# Altium PCB Rev2_7500-8500.PcbDoc
Units mil, origin at the board's own origin, x right, y up, seen from the top; angles counter-clockwise.
Board outline 1250 x 840 mil, 2 copper layers (Top Layer, Bottom Layer); 12 components, 9 nets, 58 pads, 22 vias.
Unrouted connection lines stored in the file: 2.
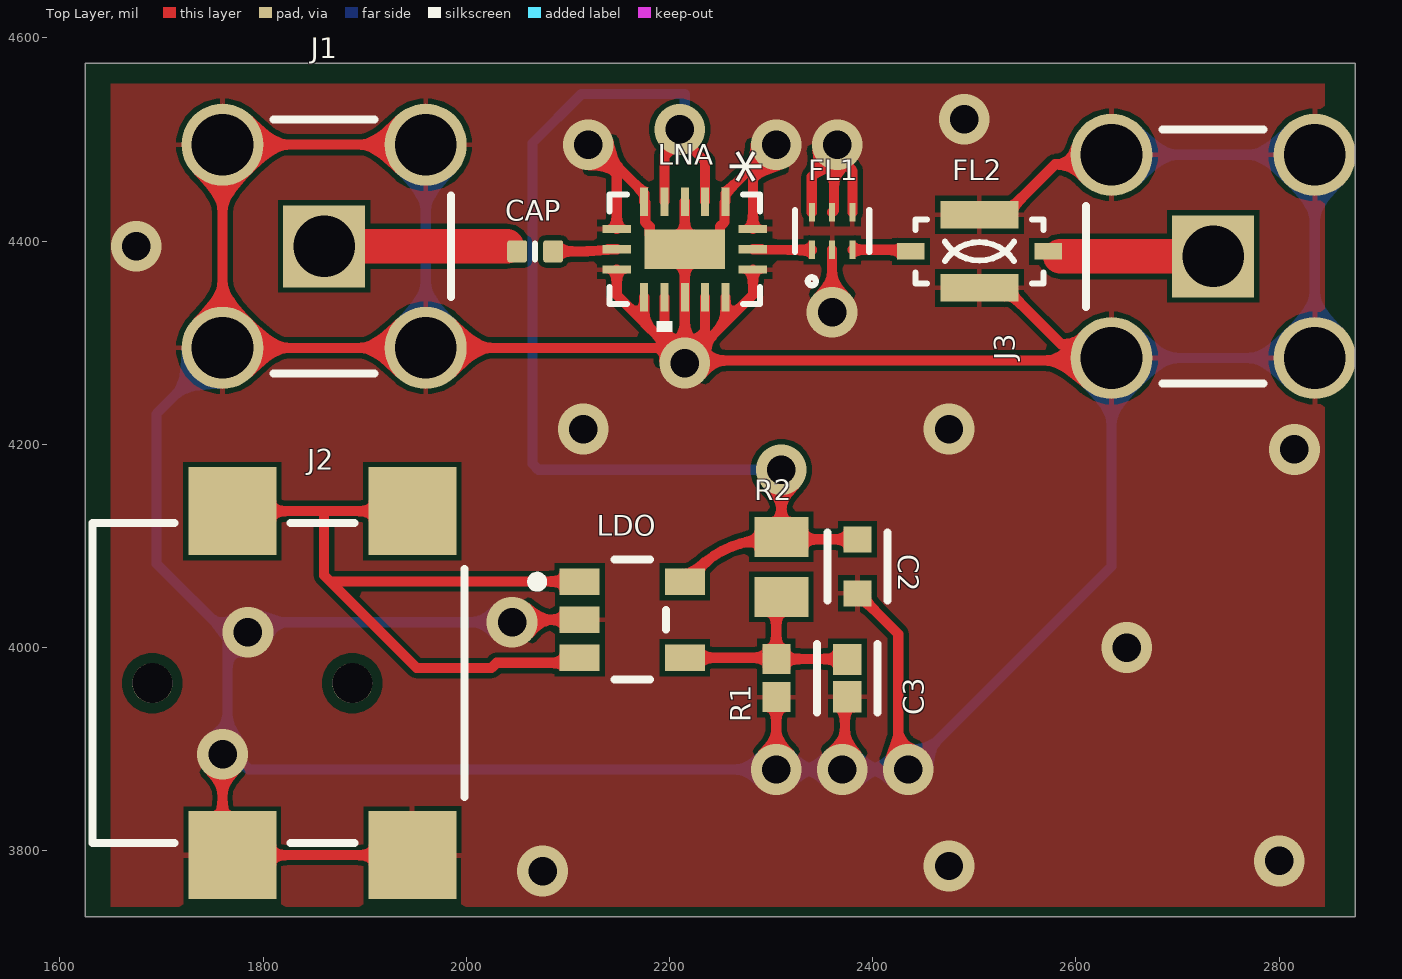
[diagram p0: Top Layer view]
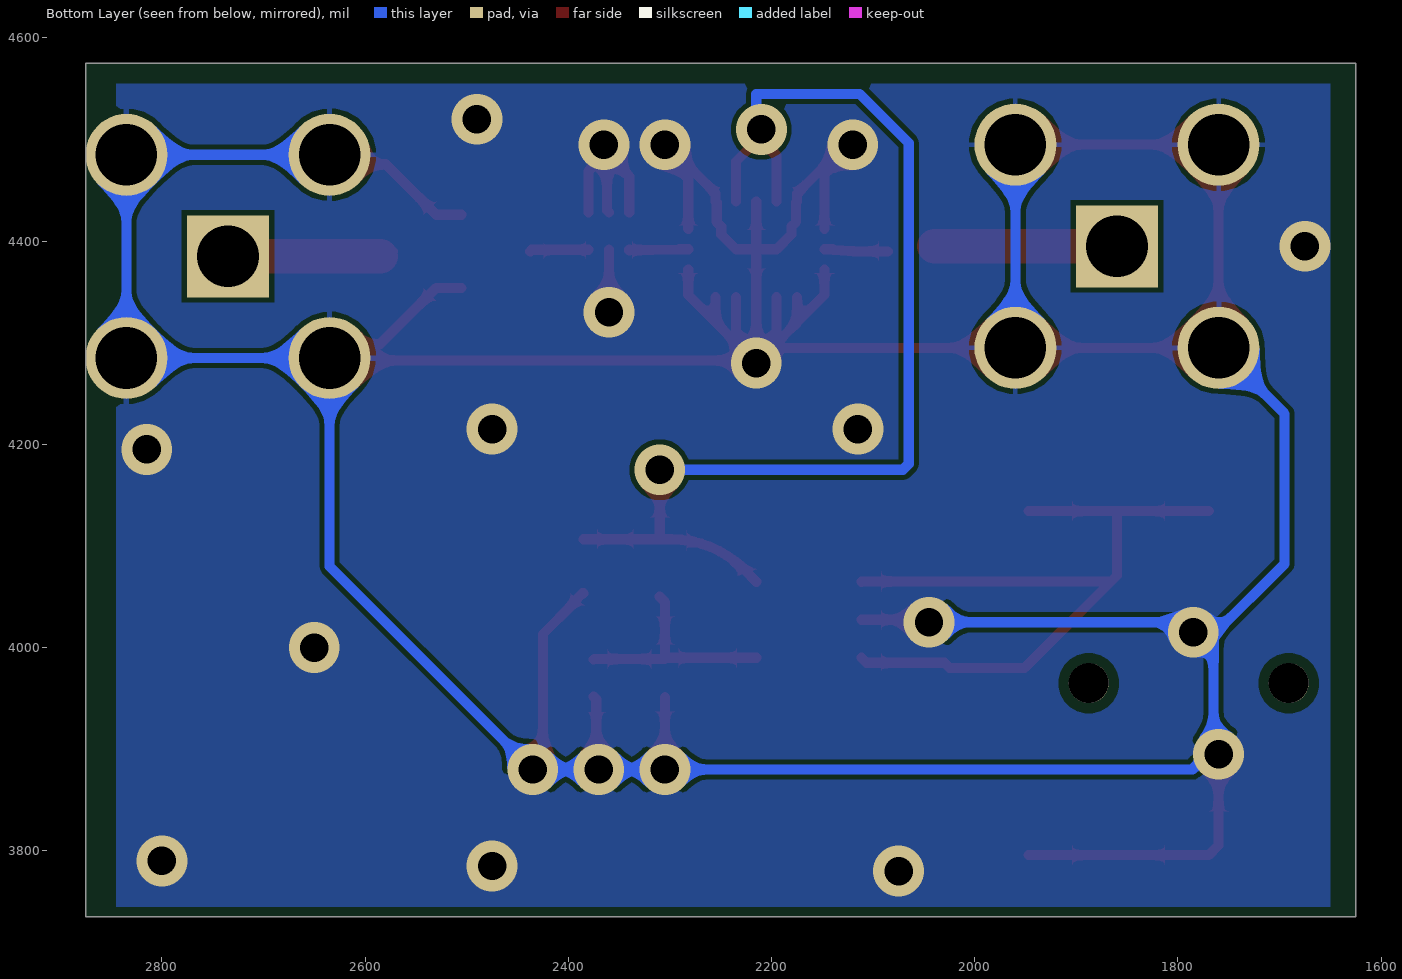
[diagram p1: Bottom Layer view, seen from below]
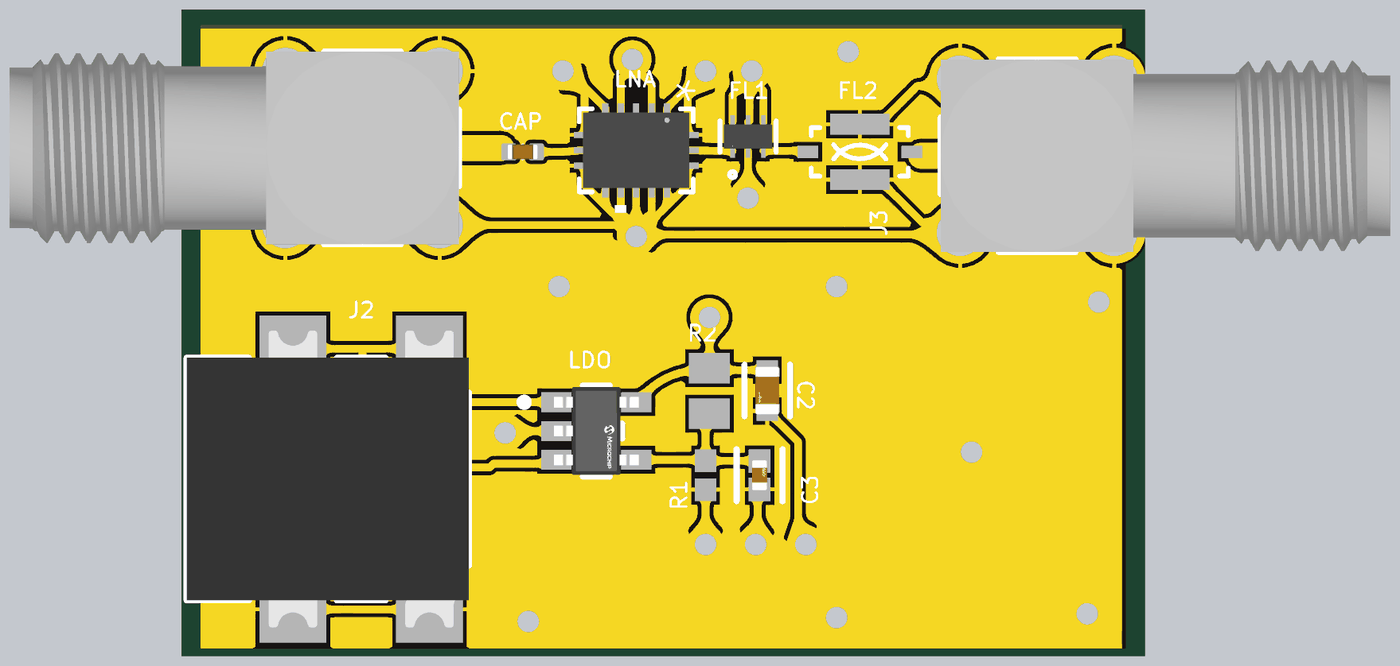
[diagram p2: 3D render of the assembled board from above, using the file's embedded part models]

## Layer stack, top to bottom
Top Solder: solder mask 0.4, Solder Resist, Dk 3.5
Top Layer: signal copper 1.4
Dielectric 1: dielectric 12.6, FR-4, Dk 4.8
Bottom Layer: signal copper 1.4
Bottom Solder: solder mask 0.4, Solder Resist, Dk 3.5

## Board outline
1625,3735 2875,3735 2875,4575 1625,4575

## Design rules (kind name [scope] priority, off if disabled: settings)
BoardOutlineClearance [All] p1: gap=7.87 ignorepadtopadclearanceinfootprint=FALSE
Clearance [All] p1: gap=5 ignorepadtopadclearanceinfootprint=FALSE except(9.84: Arc-Hole Track-Hole SMDPad-Hole THPad-Hole Via-Hole Fill-Hole Poly-Hole Region-Hole Text-Hole)
ComponentClearance [All] p1: gap=5 collisioncheckmode=3 verticalgap=5 showdistances=TRUE
DiffPairsRouting [All] p1: maxlimit=10 minlimit=5 mostfreqgap=5 toplayer_minwidth=5 toplayer_maxwidth=1000 toplayer_prefwidth=5 bottomlayer_minwidth=5 bottomlayer_maxwidth=1000 bottomlayer_prefwidth=5 maxuncoupledlength=500
Height [All] p1: minheight=0 maxheight=71497.94 prefheight=500
HoleSize [All] p1: absolutevalues=TRUE maxlimit=248.03 minlimit=11.81 maxpercent=80.000 minpercent=20.000
HoleToHoleClearance [All] p1: gap=9.84 allowstackedmicrovias=FALSE
MinimumAnnularRing [All] p1: minimumring=3
MinimumSolderMaskSliver [All] p1: minsoldermaskwidth=0
PlaneClearance [All] p1: clearance=5
PlaneConnect PlaneConnectPowerPads [InPadClass('PowerPads')] p1: planeconnectstyle=Direct reliefexpansion=20 reliefentries=4 reliefconductorwidth=10 reliefairgap=10
PlaneConnect [All] p2: pad.planeconnectstyle=Relief pad.reliefexpansion=11.81 pad.reliefentries=4 pad.reliefconductorwidth=5 pad.reliefairgap=5 via.planeconnectstyle=Direct via.reliefexpansion=11.81 via.reliefentries=4 via.reliefconductorwidth=5 via.reliefairgap=5
PolygonConnect PolygonConnectPowerPads [All vs (InPadClass('PowerPads'))] p1: connectstyle=Direct reliefconductorwidth=10 reliefentries=4 polygonreliefangle="90 Angle" airgapwidth=10
PolygonConnect [All] p2: thpad.connectstyle=Relief thpad.reliefconductorwidth=5 thpad.reliefentries=4 thpad.polygonreliefangle="90 Angle" thpad.airgapwidth=5 smdpad.connectstyle=Relief smdpad.reliefconductorwidth=5 smdpad.reliefentries=4 smdpad.polygonreliefangle="90 Angle" smdpad.airgapwidth=5 via.connectstyle=Direct via.reliefconductorwidth=5 via.reliefentries=4 via.polygonreliefangle="90 Angle" via.airgapwidth=5
RoutingVias [All] p1: holewidth=11.81 width=23.62 viastyle="Through Hole" minholewidth=11.81 minwidth=23.62 maxholewidth=23.62 maxwidth=259.84
SilkToSilkClearance [All] p1: silktosilkclearance=0
SilkToSolderMaskClearance [IsPad] p1: minsilkscreentomaskgap=5 clearancetoexposedcopper=TRUE
SolderMaskExpansion [All] p1: expansion=2.95 istentingtop=FALSE
Width [All] p1: maxlimit=1000 minlimit=5 preferedwidth=5 minimp=50.000000 maximp=50.000000 favimp=50.000000
20 further rules are at their usual default settings.

## Components (designator, comment, footprint, x,y, rotation, side; value= is the part's Value field where it differs from the comment)
C2 "2.2 uF" FP-GRM188-0_1-e0_2_0_5-MFG 2385,4080 r270 top value=2.2uF
C3 "470 pF" FP-0402-L_1_0_1-W_0_5_0_1-IPC_A 2375,3970 r90 top value=470pF
CAP "Capacitor 10nF +/-20% 50V 0402" CAPC0402(1005)60_L 2067.72,4390 r0 top value=10nF (schematic designator C1)
FL1 "Comment" JC0603C_MNC 2360,4410 r90 top
FL2 "LFCN-8400+" FV1206-4_MNC 2505,4390 r0 top
J1 "SMA IN" MOLX-731000114_V 1860,4395 r0 top
J2 "694102107102" 694102107102 1815,3965 r270 top
J3 "SMA IN" MOLX-731000114_V 2735,4385 r180 top
LDO "MIC5205YM5-TR" FP-SOT23-5LD-PL-1-MFG 2163.23,4027.4 r0 top
LNA "PMA-183PLN+" JV2579_MNC 2215,4392 r270 top
R1 "" RESC2013X60X40LL20T25 2310,4079.53 r270 top
R2 "" RESC1005X40X25ML10T10 2305,3970 r270 top

## Footprints (in the part's own frame and the unit in brackets; to place one, negate y for a bottom-side part, rotate by r counter-clockwise, add the part's x,y. Pads: shape width x height; smd on the part's side, far side on the other; paste and mask are expansions set on the pad)
694102107102 [mm] "DC Power Jack Right Angled Low Profile SMT ?3.9 with 4 soldering pads & pegs"
  rect 2.2x2.2 smd: 1(-4.3,3.35) 1(-4.3,-1.15) 2(4.3,-1.15) 3(4.3,3.35)
  round 1 hole 1 unplated: MH1(0,1.85) MH2(0,-3.15)
  silkscreen extent -4,-4.65 4,4.65, body extent -4.9,-4.65 4.9,4.65, height 5.32
CAPC0402(1005)60_L [mm] "Chip Capacitor, Body 1.0x0.5mm, Height 0.6mm, IPC High Density"
  rrect25% 0.5x0.55 smd: 1(-0.45,0) 2(0.45,0)
  silkscreen extent 0,-0.2 0,0.2, body extent -0.5,-0.25 0.5,0.25, height 0.6
FP-0402-L_1_0_1-W_0_5_0_1-IPC_A [mil]
  rect 30.75x28.04 smd paste+0 mask+0: 1(-18.33,0) 2(18.33,0)
  silkscreen extent -34,-30 34,30, body extent -42,-22 42,22, height 10
FP-GRM188-0_1-e0_2_0_5-MFG [mm]
  rect 0.65x0.7 smd paste+0 mask+0: 1(-0.675,0) 2(0.675,0)
  silkscreen extent -0.85,-0.75 0.85,0.75, body extent -1.1,-0.55 1.1,0.55, height 0.25
FP-SOT23-5LD-PL-1-MFG [mm]
  rect 1x0.66 smd paste+0 mask+0: 1(-1.315,0.95) 2(-1.315,0) 3(-1.315,-0.95) 4(1.315,-0.95) 5(1.315,0.95)
  silkscreen extent -2.5,-1.5 0.85,1.5, body extent -1.91,-1.6 1.91,1.6, height 0.25
FV1206-4_MNC [mil]
  rect 27x16 smd paste+0 mask+0: 1(-67.5,0) 3(67.5,0)
  rect 77x27 smd paste+0 mask+0: 2(0,-36) 4(0,36)
  silkscreen extent -63,-32 63,32
JC0603C_MNC [mil]
  rect 18x6 smd paste+0 mask+0: 1(-18.5,20) 2(-18.5,0) 3(-18.5,-20) 4(18.5,-20) 5(18.5,0) 6(18.5,20)
  silkscreen extent -53,-36 21,36, body extent -16,-31 16,31, height 24
JV2579_MNC [mil]
  rect 28x8 smd paste+0 mask+0: 1(-47,40) 2(-47,20) 3(-47,0) 4(-47,-20) 5(-47,-40) 9(47,-40) 10(47,-20) 11(47,0) 12(47,20) 13(47,40)
  rect 8x28 smd paste+0 mask+0: 6(-20,-67) 7(0,-67) 8(20,-67) 14(20,67) 15(0,67) 16(-20,67)
  rect 39x79 smd paste+0 mask+0: 17(0,0)
  silkscreen extent -54,-74 81,74, body extent -49,-69 49,69, height 33
MOLX-731000114_V [mm] "Connector, 5-Leads, Body 14.8x6.35mm, Pitch 2.54mm"
  rect 2.05x2.05 hole 1.54: 1(0,0)
  round 2.05 hole 1.54: 2(-2.54,2.54) 3(-2.54,-2.54) 4(2.54,-2.54) 5(2.54,2.54)
  silkscreen extent -1.26,-3.17 3.17,3.17, body extent -11.62,-3.17 3.18,3.18, height 9.57
RESC1005X40X25ML10T10 [mm] "Chip Resistor, 2-Leads, Body 1.00x0.50mm, IPC Low Density"
  rect 0.75x0.7 smd: 1(-0.475,0) 2(0.475,0)
  body extent -0.55,-0.3 0.55,0.3, height 0.4
RESC2013X60X40LL20T25 [mm] "Chip Resistor, 2-Leads, Body 2.00x1.25mm, IPC High Density"
  rect 1x1.35 smd: 1(-0.75,0) 2(0.75,0)
  body extent -1.1,-0.72 1.1,0.72, height 0.6

## Part data
C2: library part CMP-2006-02836-2, "Chip Multilayer Ceramic Capacitors for General Purpose, 0603, 2.2uF, X7R, 15%, 10%, 10V", Capacitance=2.2uF, Case Code (Imperial)=0603, Case Code (Metric)=1608, Dielectric=X7R, Max Operating Temperature=125°C, Min Operating Temperature=-55°C, Package Quantity=1, Tolerance=10%, Voltage=10V, Case/Package=0603, Depth=0.8mm, Height=0.8mm, Lead Free="Lead Free", Length=1.6mm, Material=Ceramic, Mount="Surface Mount", Number of Pins=2, Packaging="Cut Tape", REACH SVHC="No SVHC", Termination=SMD/SMT, Thickness=0.035inch, Voltage Rating=10V, Voltage Rating (DC)=10V, Weight=7.1E-05oz, Width=0.031inch
C3: library part CMP-1034-01502-3, "General Purpose Ceramic Capacitor, 0402, 470pF, 10%, X7R, 15%, 50V", Capacitance=470pF, Case Code (Imperial)=0402, Case Code (Metric)=1005, Dielectric=X7R, Max Operating Temperature=125°C, Min Operating Temperature=-55°C, Package Quantity=10000, Tolerance=10%, Voltage=50V, Case/Package=0402, Construction=Flat, Contact Plating=Tin, Depth=0.5mm, Height=0.5mm, Lead Free="Lead Free", Length=1mm, Mount="Surface Mount", Number of Pins=2, Packaging="Tape and Reel", Radiation Hardening=No, REACH SVHC="No SVHC", RoHS Compliant=Yes, Series=-, Termination=SMD/SMT, Thickness=0.022inch, Voltage Rating=50V, Voltage Rating (DC)=50V, Width=0.5mm
CAP: library part CMP-001-00069-3, "Chip Capacitor, 10nF +/-20%, 50V, 0402, Thickness 0.6 mm", Case/Package=0402, Max Operating Temperature=85°C, Min Operating Temperature=-55°C, Tolerance=5%, Voltage Rating=50V, Mounting Technology=SMT, Pins=2
FL2 LNA: "No Description Available", Mfr_Name="Mini Circuits", Copyright="Copyright (C) 2024 Ultra Librarian. All rights reserved.", RefDes=RefDes, Type=DEV
  FL2: Manufacturer_Part_Number=LFCN-8400+
  LNA: Manufacturer_Part_Number=PMA-183PLN+
J1 J3: library part CMP-2000-05487-1, "SMA Right-Angle PCB Jack Receptacle, Brass Body, Gold Plated, 50 Ohm, 5-Pin THD, RoHS, Tray", Manufacturer=Molex, Package Description="5-Pin Through Hole Device, Body 14.8 x 6.35 mm, Pitch 2.54 mm", Package Reference=731000114, Datasheet URL=http://www.molex.com/webdocs/datasheets/pdf/en-us/0731000114_RF_COAX_CONNECTORS.pdf, Datasheet Version=09/2016, Manufacturer URL=http://www.molex.com/, Mounting Technology=ThroughHole, Package URL=http://www.molex.com/pdm_docs/sd/731000114_sd.pdf
J2: library part CMP-1502-00174-2, Color=Black, Current Rating=5A, Flammability Rating="UL94 V-0", Insulation Resistance=100MΩ, Max Operating Temperature=85°C, Min Operating Temperature=-40°C, Operating Supply Voltage=18V, Connector Type=Power, Contact Gender=Female, Contact Plating=Tin, Gender=Male, Housing Material=Polyamide, Mount="Surface Mount", NexarPartId=52645180, Packaging="Tape and Reel", REACH SVHC=Unknown, RoHS=Compliant, Shielding=Unshielded, Termination=SMD/SMT, Voltage Rating=18V, Voltage Rating (DC)=18V
LDO: library part CMP-06324-000022-1, "IC REG LIN POS ADJ 150MA SOT23-5", Dropout Voltage=165mV, Manufacturer=Microchip, Max Junction Temp=+125°C, Max Supply Voltage=16V, Min Supply Voltage=2.5V, Nominal Supply Current=80-1300uA, Output Current=150mA, Package=SOT23-5LD-PL-1, Temperature="-40°C to +125°C", Temperature Range Low=-40°C, Accuracy Percentage=1%, Automotive=No, Category=IC, ComponentLink2Description=Datasheet, ComponentLink2URL=http://ww1.microchip.com/downloads/en/DeviceDoc/20005785A.pdf, Device Class L1="Integrated Circuits (ICs)", Device Class L2="Power Management ICs", Device Class L3="Voltage Regulators - Linear", Digikey Description="IC REG LIN POS ADJ 150MA SOT23-5", Height=1.45mm, Lead Free=Yes, Manufacturer Part Number=MIC5205YM5-TR, Mouser Description="LDO Voltage Regulators 150mA 1% Low Noise LDO (Lead Free)", Number Of Outputs=1, Octopart=https://octopart.com/mic5205ym5-tr-microchip-66802135, Output Type=AdjustableProgrammable, RoHS=TRUE, Standoff Height=0mm, Temperature Range High=+125°C
R1: library part CMP-2001-00628-1, Manufacturer=Panasonic, Part Number=ERA6AEB331V
R2: library part CMP-2002-05819-1, Manufacturer=Panasonic, Part Number=ERA-2AEB621X

## Via types
v1: diameter 50, hole 28, Top Layer to Bottom Layer, 22 vias

## Nets (pads, with @x,y where several pads share a name; then routed paths per layer and width w, separated by ;. In a path a pad name is that pad's centre, name@x,y a point inside that pad or via, vN(x,y) a via of type N, cw(c..) or ccw(c..) an arc to the next point about the centre after c; other vN are vias at no path point)
GND: C2.2 C3.1 FL1.2 FL1.4 FL1.5 FL1.6 FL2.2 FL2.4 J1.2 J1.3 J1.4 J1.5 J2.2 J2.3 J3.2 J3.3 J3.4 J3.5 LDO.2 LNA.1 LNA.3 LNA.5 LNA.6 LNA.8 LNA.9 LNA.10 LNA.11 LNA.12 LNA.13 LNA.14 LNA.16 LNA.17 R2.2 | length 6283.4
  Top Layer w10: v1(1760,3895) 1760,3805.44 J2.2 J2.3 ; J1.5 J1.2 J1.3 J1.4 2189.18,4295 2204.18,4280 v1(2215,4280) ; v1(2045,4025) 2047.4,4027.4 LDO.2 ; LNA.8 2148,4347 2175,4320 ; LNA.6 2148,4466.43 2120,4494.43 v1(2120,4495) 2127,4495 2175,4447 LNA.5 2176,4438 2176,4418.79 2180.5,4414.29 2180.5,4406.5 2195,4392 LNA.17 ; LNA.9 2175,4320 ; LNA.10 2195,4310.82 v1@2215,4290.82 ; LNA.3 LNA.17 ; LNA.12 2235,4310.82 v1@2215,4290.82 ; LNA.13 2255,4320 ; LNA.14 2282,4347 2255,4320 ; LNA.16 2282,4461.43 2305,4484.43 v1(2305,4495) 2303,4495 2255,4447 LNA.1 2254,4438 2254,4418.79 2249.5,4414.29 2249.5,4406.5 2235,4392 LNA.17 ; v1@2305,3895 R2.2 ; FL1.6 2340,4463.43 2362,4485.43 2362,4430.5 FL1.5 ; v1(2360,4330) FL1.2 ; v1(2365,4495) 2365,4484.18 2380,4469.18 FL1.4 ; v1(2370,3880) 2372.5,3882.5 2372.5,3949.17 C3.1 ; C2.2 2385.98,4053.43 2393.78,4045.63 2393.78,4044.65 2425,4013.43 v1@2425,3900 ; FL2.2 2530,4354 2585.47,4298.53 2621.47,4298.53 J3.5 2632.5,4282.5 v1@2217.5,4282.5 ; FL2.4 2530,4426 2579.65,4475.65 2625.65,4475.65 J3.4 ; 2175,4320 v1(2215,4280) ; v1(2215,4280) v1@2215,4290.82 ; v1(2215,4280) v1@2217.5,4282.5 ; v1@2215,4290.82 LNA.11 LNA.17 ; v1@2217.5,4282.5 2255,4320
  Bottom Layer w10: J1.3 1695,4230 1695,4082.5 v1@1765,4012.5 ; J1.4 J1.5 ; v1(2045,4025) 1777.5,4025 v1@1765,4012.5 ; J3.4 J3.3 J3.2 J3.5 2635,4080 v1(2435,3880) v1(2370,3880) v1(2305,3880) 1785.82,3880 1770.82,3895 v1(1760,3895) 1765,3900 v1@1765,4012.5
  other v1: 2075,3780 2475,3785 2800,3790 2650,4000 1785,4015 2815,4195 2115,4215 2475,4215 1675,4395 2490,4520
NetC1_1: CAP.1 J1.1 | length 185
  Top Layer w10: CAP.1 CAP.1@2050,4395
  Top Layer w33.8: J1.1 2040,4395
NetC1_2: CAP.2 LNA.7 | length 63.6
  Top Layer w10: CAP.2 2118.63,4390 ; LNA.7 2139.72,4392 2139.1,4391.39 2119.31,4390.02 ; 2118.63,4390 ccw(c2118.63,4400) 2119.31,4390.02 ; 2118.63,4390 ccw(c2118.63,4400) 2119.31,4390.02
NetC2_1: C2.1 LDO.5 LNA.2 LNA.4 R1.1 | length 512.1
  Top Layer w10: LNA.4 2195,4484.18 2202.35,4491.52 2202.35,4502.65 v1@2195,4510 ; v1(2210,4510) v1@2195,4510 ; LDO.5 LDO.5@2227.48,4077.29 ; LNA.2 2235,4478.43 2203.43,4510 v1@2195,4510 ; R1.1 v1(2310,4175) ; C2.1 R1.1@2298.19,4106.57 ; LDO.5@2227.48,4077.29 cw(c2298.19,4006.57) R1.1@2298.19,4106.57 ; LDO.5@2227.48,4077.29 cw(c2298.19,4006.57) R1.1@2298.19,4106.57
NetC3_2: C3.2 LDO.4 R1.2 R2.1 | length 224.1
  Top Layer w10: LDO.4 2303.7,3990 R2.1 ; R1.2 2305,4045 R2.1 ; C3.2 2374.63,3988.7 R2.1
NetFL1_1: FL1.1 LNA.15 | length 58.5
  Top Layer w10: LNA.15 2290.28,4392 2290.42,4391.87 2339.99,4391.09 FL1.1
NetFL1_3: FL1.3 FL2.1 | length 58.1
  Top Layer w10: FL1.3 2436,4391.5 FL2.1
NetFL2_3: FL2.3 J3.1 | length 44.4
  Top Layer w10: FL2.3 FL2.3@2581,4387 ; J3.1@2699.65,4387 J3.1
NetJ2_1: J2.1 LDO.1 LDO.3 | length 780.2
  Top Layer w10: J2.1@1769.73,4134.29 1858.31,4134.29 ; J2.1@1946.89,4134.29 1858.31,4134.29 ; LDO.3 2106.46,3985 2029.88,3985 2024.88,3980 1950.86,3980 1865.86,4065 ; LDO.1 2111.26,4065 1865.86,4065 ; 1858.31,4134.29 1860,4132.6 1860,4070.86 1865.86,4065
pads on no net: J2.MH1 J2.MH2
copper on no net: | length 933.4
  Top Layer w10: 2572.5,4390 ccw(c2584.57,4402.07) 2584.57,4385
  Top Layer w33.8: 2584.57,4385 2735,4385
  Bottom Layer w10: 2210,4510 ccw(c2197.93,4522.07) 2215,4522.07 2215,4545 2113.43,4545 2065,4496.57 2065,4180.86 2070.86,4175 2305,4175 2310,4175

## Polygon pours and split planes (outlines as drawn)
GND on Top Layer "GND_L01_P000" (solid, pour order 0): 1650,4555 1650,3745 2845,3745 2845,4555
GND on Bottom Layer "GND_L02_P001" (solid, pour order 1): 1650,4555 1650,3745 2845,3745 2845,4555

## Silkscreen, mask and mechanical layers (free items; w line width, h text height)
Top Solder:
  rectangle: 1650,3745 2850,4550
Bottom Solder:
  rectangle: 1650,3745 2850,4550

## Text inside footprints (layer, text, board x,y; h text height)
LNA: Top Overlay "*" at 2240,4490.5 h50 r270; Top Assembly "*" at 2240,4437.5 h50 r270